# EAGLE board netzteil (EAGLE 7.7.0)
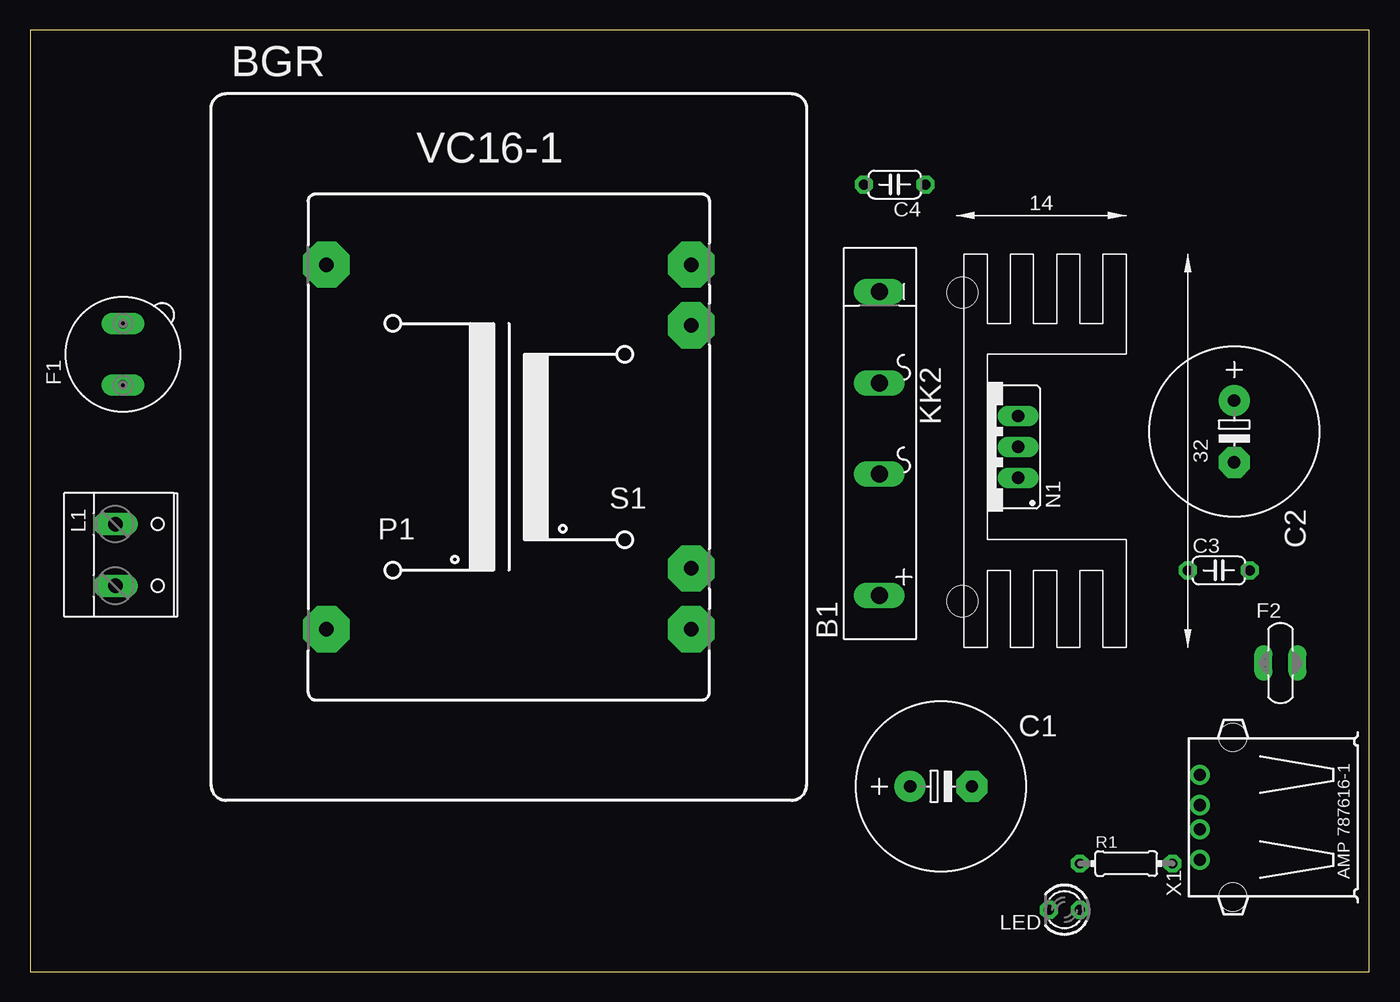
[diagram p0: board, top side]
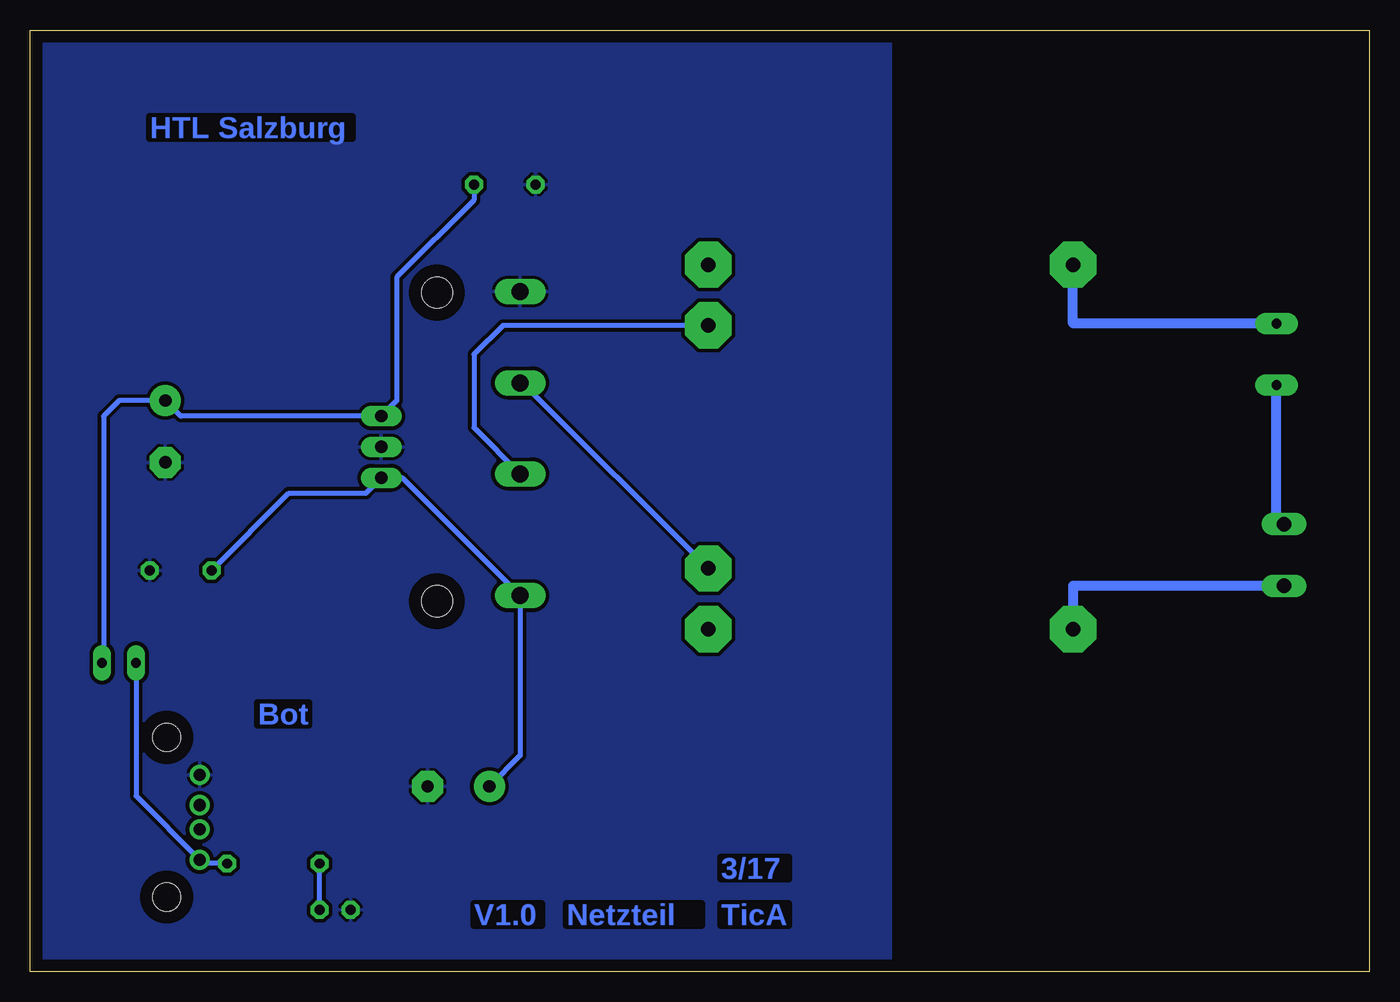
[diagram p1: board, bottom side, seen from below]

Size 110.16 x 77.46 mm. Coordinates in mm from the lower left corner, seen from the top.
Outline: 0,0 110.16,0 110.16,77.46 0,77.46 0,0
Copper layers (1*16): Top 0.035mm / dielectric 1.5mm / Bottom 0.035mm
Design rules "HTL": minimum track width 16mil, minimum drill 24mil, track to track 8mil, track to pad 8mil, pad to pad 8mil, via to via 8mil, smd to smd 8mil, copper to edge 40mil, drill to drill 8mil, minimum pad ring 13mil, minimum via ring 13mil, stop-mask expansion 4mil, vias tented up to drill 0mil, thermal gap 10mil

## Footprints (pad centres in the part's own frame; a part is rotated, then mirrored left to right if it is on the bottom)
FB32 = drill 1.397 long: + -13.5,0; - 11.494,0; AC1 -3.492,0; AC2 4.001,0
VC16-1 = drill 1.194 pad 3.81 octagon: 1 -15,15; 7 -15,-15; 8 15,-15; 9 15,-10; 13 15,10; 14 15,15
E5-13 = drill 1.016 pad 2.54: + -2.54,0 | drill 1.016 pad 2.54 octagon: - 2.54,0
C050-024X044 = drill 0.813 octagon: 1 -2.54,0; 2 2.54,0
19560 = drill 0.813 pad 1.778 long: 1 -2.54,0; 2 2.54,0
P660A = drill 0.813 long: 1 -1.397,0; 2 1.397,0
SK104 = hole 2.54: -12.7,-0.762; 12.7,-0.762
W237-132 = drill 1.194 long: 1 -2.54,-0.635; 2 2.54,-0.635
LED3MM = drill 0.813 octagon: A -1.27,0; K 1.27,0
78XXS = drill 1.016 long: GND 0,-2.54; IN -2.54,-2.54; OUT 2.54,-2.54
0204/7 = drill 0.813 octagon: 1 -3.81,0; 2 3.81,0
USB = drill 1: 1 -3.5,12.99; 2 -1,12.99; 3 1,12.99; 4 3.5,12.99 | hole 2.3: -6.57,10.28; 6.57,10.28

## Placement (x,y rotation side)
B1  [FB32]  69.85,44.45 90 top
BGR  [VC16-1]  39.37,43.18 0 top
C1  1500u  [E5-13]  74.93,15.24 0 top
C2  100u  [E5-13]  99.06,44.45 270 top
C3  100n  [C050-024X044]  97.79,33.02 0 top
C4  100n  [C050-024X044]  71.12,64.77 180 top
F1  [19560]  7.62,50.8 90 top
F2  [P660A]  102.87,25.4 0 top
KK2  SK104  [SK104]  77.47,43.18 270 top
L1  [W237-132]  7.62,34.29 270 top
LED  gn  [LED3MM]  85.09,5.08 180 top
MEASURE  [MEASURE]  5.08,0 0 top
N1  [78XXS]  78.74,43.18 90 top
R1  1k2  [0204/7]  90.17,8.89 0 top
X1  [USB]  109.22,12.7 90 top

## Library data of the parts
B1 = rectifier
BGR = trafo_TicA
C1-C4 R1 = rcl_TicA
F1 = fuse; MPN: 56000001009; OC_FARNELL: 1185363; OC_NEWARK: 15P8392
F2 = ptc-ntc; OC_FARNELL: unknown; OC_NEWARK: unknown
KK2 = heatsink_TicA
L1 = con_TicA; OC_FARNELL: unknown; OC_NEWARK: unknown
LED = led; MF: VISHAY SEMICONDUCTOR; OC_FARNELL: 1612435
MEASURE = measure
N1 = ic-linear_TicA
X1 = con-amp

## Nets
GND: B1.- C1.- C2.- C3.2 C4.2 LED.K N1.GND X1.4
N$1: F1.1 L1.1
N$2: BGR.1 F1.2
N$3: BGR.7 L1.2
N$4: B1.AC1 BGR.13
N$5: B1.AC2 BGR.9
N$6: F2.1 R1.2 X1.1
N$7: B1.+ C1.+ C3.1 N1.IN
N$9: C2.+ C4.1 F2.2 N1.OUT
N$10: LED.A R1.1

## Tracks (layer width: path | path; a pad name or v marks a point on that pad's centre or on a via)
GND
  pour Bottom (isolate 0.305): 39.37,43.18 39.37,0 110.49,0 110.49,77.47 39.37,77.47
N$1
  Bottom 0.254: L1.1 7.62,36.83
  Bottom 0.813: 7.62,36.83 F1.1
N$2
  Bottom 0.813: F1.2 24.37,53.34 BGR.1
N$3
  Bottom 0.813: L1.2 24.37,31.75 BGR.7
N$4
  Bottom 0.406: BGR.13 71.28,53.18 73.66,50.8 73.66,44.77 B1.AC1
N$5
  Bottom 0.254: B1.AC2 69.64,48.45
  Bottom 0.406: 69.64,48.45 BGR.9
N$6
  Bottom 0.406: R1.2 95.92,8.89 X1.1 101.47,14.44 F2.1
N$7
  Bottom 0.406: C1.+ 69.85,17.78 B1.+ 79.54,40.64 N1.IN 82.55,39.37 88.9,39.37 C3.1
N$9
  Bottom 0.406: C4.1 73.66,63.5 80.01,57.15 80.01,46.99 N1.OUT 97.79,45.72 C2.+ 102.87,46.99 104.14,45.72 104.14,25.53 F2.2
N$10
  Bottom 0.406: LED.A R1.1

## Text on the board
Bottom: HTL Salzburg | Bot | 3/17 | TicA | Netzteil | V1.0
_tsilk: BGR | VC16-1 | 100n | C4 | SK104 | KK2 | 100u | F1 | O | - | I | 1 | L1 | S1 | N1 | C2 | P1 | 2 | C3 | 100n | F2 | B1 | C1 | 1500u | R1 | 1k2 | AMP 787616-1 | gn | X1 | LED